# EAGLE board P004_AmanPandey_Speaker (EAGLE 9.6.2)
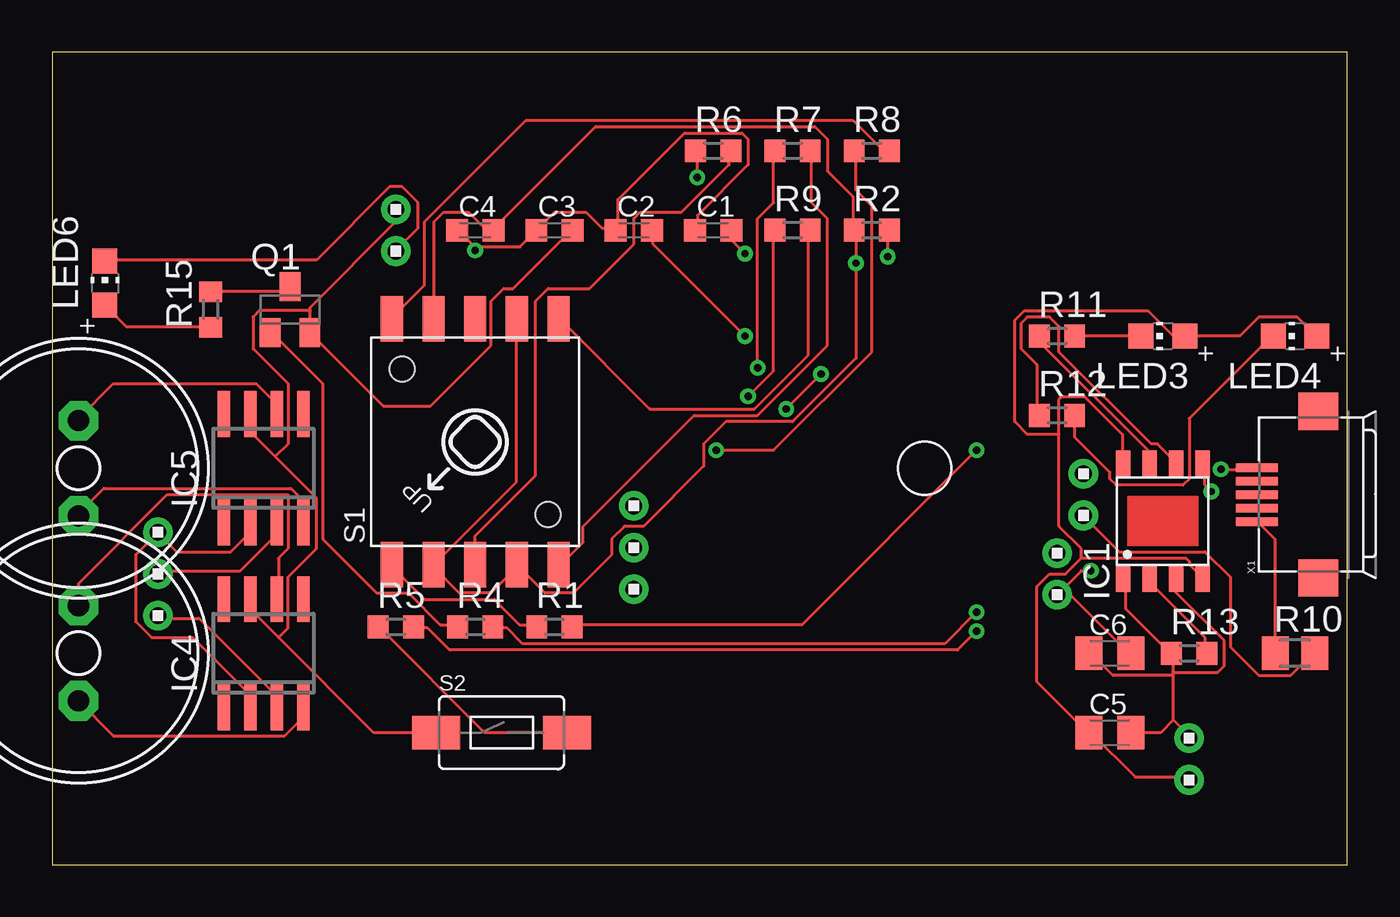
[diagram p0: board, top side]
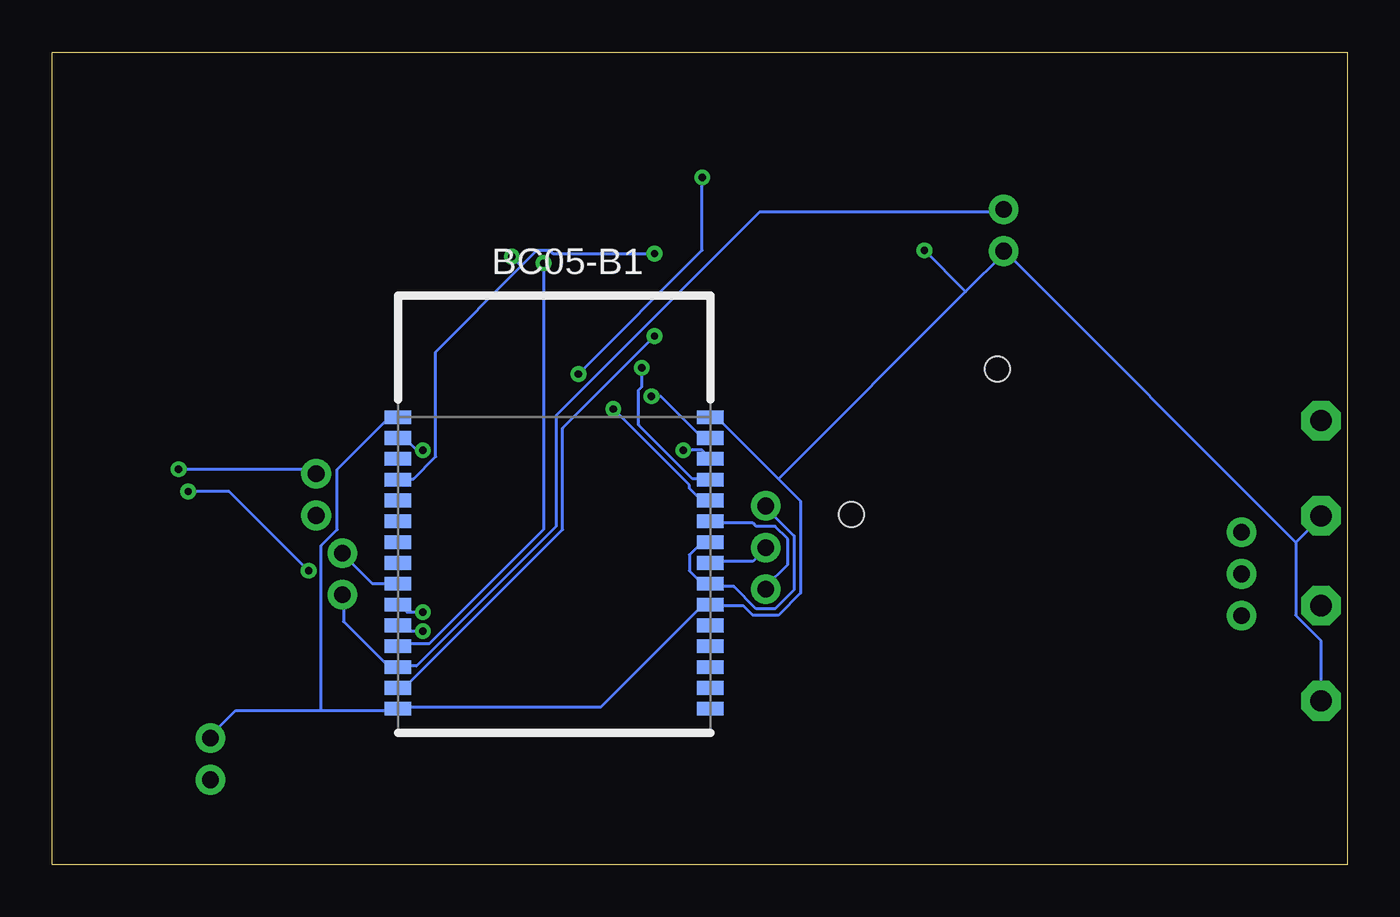
[diagram p1: board, bottom side, seen from below]

Size 62.21 x 39.04 mm. Coordinates in mm from the lower left corner, seen from the top.
Outline: 0,0 62.21,0 62.21,39.04 0,39.04 0,0
Copper layers (1*16): Top 0.035mm / dielectric 1.5mm / Bottom 0.035mm
Design rules "default": minimum track width 6mil, minimum drill 0.35mm, track to track 6mil, track to pad 6mil, pad to pad 6mil, via to via 6mil, smd to smd 6mil, copper to edge 40mil, drill to drill 6mil, minimum pad ring 10mil, minimum via ring 8mil, stop-mask expansion 4mil, vias tented up to drill 0mil, thermal gap 10mil

## Footprints (pad centres in the part's own frame; a part is rotated, then mirrored left to right if it is on the bottom)
BC05-B = smd 1.27 x 0.66 bottom: P$1 7.5,6.26; P$2 7.5,5.26; P$3 7.5,4.26; P$4 7.5,3.26; P$5 7.5,2.26; P$6 7.5,1.26; P$7 7.5,0.26; P$8 7.5,-0.74; P$9 7.5,-1.74; P$10 7.5,-2.74; P$11 7.5,-3.74; P$12 7.5,-4.74; P$13 7.5,-5.74; P$14 7.5,-6.74; P$15 7.5,-7.74; P$16 -7.5,-7.74; P$17 -7.5,-6.74; P$18 -7.5,-5.74; P$19 -7.5,-4.74; P$20 -7.5,-3.74; P$21 -7.5,-2.74; P$22 -7.5,-1.74; P$23 -7.5,-0.74; P$24 -7.5,0.26; P$25 -7.5,1.26; P$26 -7.5,2.26; P$27 -7.5,3.26; P$28 -7.5,4.26; P$29 -7.5,5.26; P$30 -7.5,6.26
C0603K = smd 1.05 x 1.08: 1 -0.875,0; 2 0.875,0
C0805K = smd 1.3 x 1.6: 1 -1,0; 2 1,0
SOP-8 = smd 1.3 x 0.7: 1 -2.75,1.905; 2 -2.75,0.635; 3 -2.75,-0.635; 4 -2.75,-1.905; 5 2.75,-1.905; 6 2.75,-0.635; 7 2.75,0.635; 8 2.75,1.905
SO8 = smd 0.6 x 2.2: 1 -1.905,-2.6; 2 -0.635,-2.6; 3 0.635,-2.6; 4 1.905,-2.6; 5 1.905,2.6; 6 0.635,2.6; 7 -0.635,2.6; 8 -1.905,2.6
CHIP-LED0805 = smd 1.2 x 1.2: A 0,-1.05; C 0,1.05
SOT23-BEC = smd 1 x 1.4: B -0.95,-1.1; C 0,1.1; E 0.95,-1.1
R0603 = smd 1 x 1.1: 1 -0.85,0; 2 0.85,0
M0805 = smd 1.3 x 1.6: 1 -0.95,0; 2 0.95,0
BUTTON = smd 2.184 x 1.067: A -5.9,4; B -5.9,-4; C 5.9,-4; D 5.9,4; E1 -5.9,0; E2 5.9,0; G1 -5.9,2; G2 -5.9,-2; G3 5.9,-2; G4 5.9,2 | hole 1.2: -3.5,-3.5; 3.5,3.5
TACTILE-SWITCH-1101NE = smd 2.3 x 1.6: P$1 -3.15,0; P$2 3.15,0
AL11P = drill 1.016 pad 1.905 octagon: + 2.286,0; - -2.286,0
1X2 = drill 0.8 pad 1.422: 1 -1,0; 2 1,0
1X3 = drill 0.8 pad 1.422: 1 -2,0; 2 0,0; 3 2,0
USB-MICROB = smd 0.4 x 2: D+ 0,3.1; D- -0.65,3.1; GND 1.3,3.1; ID 0.65,3.1; VBUS -1.3,3.1 | smd 1.8 x 1.9: GND@2 -4,0.15; GND@3 4,0.15

## Placement (x,y rotation side)
BC05-B1  BC05-B  [BC05-B]  38.1,15.24 0 top
C1  104  [C0603K]  31.75,30.48 0 top
C2  475  [C0603K]  27.94,30.48 0 top
C3  475  [C0603K]  24.13,30.48 0 top
C4  475  [C0603K]  20.32,30.48 0 top
C5  10uF  [C0805K]  50.8,6.35 0 top
C6  10uF  [C0805K]  50.8,10.16 0 top
IC1  TP4056  [SOP-8]  53.34,16.51 90 top
IC4  AD620R  [SO8]  10.16,10.16 0 top
IC5  AD620R  [SO8]  10.16,19.05 0 top
LED3  RED  [CHIP-LED0805]  53.34,25.4 90 top
LED4  GREEN  [CHIP-LED0805]  59.69,25.4 90 top
LED6  Blue  [CHIP-LED0805]  2.54,27.94 0 top
Q1  MMBT3906LT1SMD  [SOT23-BEC]  11.43,26.67 0 top
R1  10k  [R0603]  24.13,11.43 0 top
R2  10k  [R0603]  39.37,30.48 0 top
R4  1k  [R0603]  20.32,11.43 0 top
R5  10k  [R0603]  16.51,11.43 0 top
R6  10k  [R0603]  31.75,34.29 0 top
R7  10k  [R0603]  35.56,34.29 0 top
R8  10k  [R0603]  39.37,34.29 0 top
R9  10k  [R0603]  35.56,30.48 0 top
R10  0.5R  [M0805]  59.69,10.16 0 top
R11  1K  [R0603]  48.26,25.4 0 top
R12  1K  [R0603]  48.26,21.59 0 top
R13  5K  [R0603]  54.61,10.16 0 top
R15  47R  [R0603]  7.62,26.67 90 top
S1  BUTTON  [BUTTON]  20.32,20.32 90 top
S2  SWITCH-MOMENTARY-2-SMD-1101NE  [TACTILE-SWITCH-1101NE]  21.59,6.35 0 top
SP1  AL11P  [AL11P]  1.27,10.16 90 top
SP2  AL11P  [AL11P]  1.27,19.05 90 top
U$1  1X2  [1X2]  16.51,30.48 270 top
U$2  1X3  [1X3]  27.94,15.24 270 top
U$3  1X2  [1X2]  49.53,17.78 90 top
U$4  1X2  [1X2]  54.61,5.08 90 top
U$5  1X2  [1X2]  48.26,13.97 90 top
U$7  1X3  [1X3]  5.08,13.97 270 top
X1  USB-MICROB  [USB-MICROB]  60.96,17.78 90 top

## Library data of the parts
BC05-B1 S1 = ggaqquay
C1-C6 R1 R2 R4-R13 R15 = resistor
IC1 = TP4056
IC4 IC5 = analog-devices; MPN: AD620AR; OC_FARNELL: 1464424; OC_NEWARK: 05F7109
LED3 LED4 LED6 = adafruit
Q1 = transistor-pnp
S2 = SparkFun-Electromechanical
SP1 SP2 = buzzer; OC_FARNELL: unknown; OC_NEWARK: unknown
U$1-U$5 U$7 = headers(2mm)
X1 = SparkFun

## Nets
1.8V: BC05-B1.P$12 C4.2 R2.1 S1.G1 S1.G2 S1.G3 S1.G4
BLUE_LED: Q1.B R4.1
GND: BC05-B1.P$1 BC05-B1.P$15 BC05-B1.P$21 BC05-B1.P$30 C1.1 C2.1 C3.1 C4.1 C5.2 C6.1 IC1.1 IC1.3 IC4.4 IC5.4 LED6.C R13.1 SP1.- SP2.- U$1.2 U$4.2
N$1: BC05-B1.P$2 R1.2
N$2: BC05-B1.P$4 C1.2 R2.2
N$3: BC05-B1.P$11 R5.2
N$4: BC05-B1.P$10 R4.2
N$5: IC4.2 IC5.2 U$7.1
N$8: BC05-B1.P$23 U$2.2
N$9: BC05-B1.P$29 R9.1
N$10: BC05-B1.P$28 R8.1
N$11: BC05-B1.P$27 R7.1
N$12: BC05-B1.P$26 R6.1
N$13: R7.2 S1.B
N$14: R8.2 S1.D
N$15: R6.2 S1.E1
N$16: R10.2 U$3.1
N$17: R1.1 S1.A
N$18: R5.1 S2.P$2
N$19: BC05-B1.P$25 U$2.3
N$20: BC05-B1.P$14 C2.2
N$21: BC05-B1.P$22 BC05-B1.P$24 U$2.1
N$22: R10.1 X1.VBUS
N$23: C5.1 IC1.4 IC1.8 LED3.A LED4.A U$4.1
N$24: IC1.7 R11.1
N$25: LED3.C R11.2
N$26: LED4.C R12.2
N$27: IC1.6 R12.1
N$28: IC5.3 U$7.2
N$30: IC1.2 R13.2
N$31: LED6.A R15.1
N$32: IC4.3 U$7.3
N$33: R9.2 S1.C
N$34: U$3.2 X1.GND
N$35: Q1.C R15.2
N$41: IC4.6 SP1.+
N$42: IC5.6 SP2.+
RED_LED: BC05-B1.P$9 U$5.2
VCC: BC05-B1.P$13 C3.2 C6.2 IC1.5 IC4.7 IC5.7 Q1.E S2.P$1 U$1.1 U$5.1

## Tracks (layer width: path | path; a pad name or v marks a point on that pad's centre or on a via)
1.8V  (via drill 0.35)
  Top 0.152: S1.G3 22.3,26.16 22.3,18.39 18.34,14.43 S1.G1 18.34,14.28 19.56,13.06 21.08,13.06 22.3,14.28 S1.G2 22.45,14.28 23.67,13.06 25.04,13.06 26.87,14.88 26.87,15.65 27.48,16.26 28.4,16.26 31.29,19.15 31.29,20.22 32.36,21.28 35.56,21.28 38.61,24.33 v38.61,28.91 38.61,30.43 R2.1 38.46,30.58 38.46,32.11 37.24,33.33 37.24,34.85 36.63,35.46 26.11,35.46 21.23,30.58 C4.2 21.08,30.58 20.78,30.58 20.02,31.34 18.8,31.34 18.34,30.89 18.34,26.31 S1.G4
  Bottom 0.152: v38.61,28.91 38.61,16.1 44.09,10.62 45.47,10.62 BC05-B1.P$12
BLUE_LED
  Top 0.152: R4.1 19.41,11.53 18.64,11.53 17.12,13.06 15.6,13.06 13,15.65 13,23.11 10.57,25.55 Q1.B
GND  (via drill 0.35)
  Top 0.152: 53.85,6.96 53.85,9.09 | 53.85,9.09 53.85,9.25 | 53.85,9.25 53.85,10.16 R13.1 53.7,10.16 51.56,12.29 51.56,13.67 IC1.1 | 53.85,6.96 54.61,6.2 U$4.2 | 53.85,9.25 55.98,9.25 56.29,9.55 56.29,10.77 54,13.06 54,13.67 IC1.3 | C5.2 53.24,6.35 53.85,6.96 | 53.85,9.09 50.95,9.09 49.89,10.16 C6.1 | SP1.- 2.95,6.2 11.18,6.2 11.94,6.96 11.94,7.42 IC4.4 | IC5.4 11.94,16.56 11.94,17.63 11.48,18.09 2.49,18.09 1.27,16.87 SP2.- | 20.32,29.67 19.56,30.43 C4.1 | 20.32,29.67 22.45,29.67 23.22,30.43 C3.1 23.37,30.58 24.13,31.34 25.65,31.34 26.42,30.58 27.03,30.58 C2.1 27.18,30.58 27.18,31.95 30.38,35.15 33.12,35.15 33.43,34.85 33.43,33.63 30.99,31.19 30.99,30.58 C1.1 | LED6.C 2.64,29.06 12.7,29.06 16.2,32.56 16.81,32.56 17.58,31.8 17.58,30.58 16.51,29.52 U$1.2 | v20.32,29.52 20.32,29.67
  Bottom 0.152: 49.28,7.42 53.39,7.42 54.61,6.2 U$4.2 | 49.28,7.42 45.62,7.42 BC05-B1.P$15 45.47,7.57 35.86,7.57 30.99,12.45 30.68,12.45 BC05-B1.P$21 30.53,12.45 29.01,12.45 28.55,11.99 27.33,11.99 26.26,13.06 26.26,17.48 27.33,18.54 | 49.28,7.42 49.28,15.34 48.51,16.1 48.51,19 46.08,21.44 45.62,21.44 BC05-B1.P$1 | SP1.- 1.27,10.77 2.49,11.99 2.49,15.49 | 2.49,15.49 1.27,16.71 SP2.- | 27.33,18.54 30.23,21.44 30.53,21.44 BC05-B1.P$30 | 18.34,27.53 16.51,29.36 U$1.2 16.51,29.52 2.49,15.49 | 18.34,27.53 27.33,18.54 | 18.34,27.53 v20.32,29.52
N$1  (via drill 0.35)
  Top 0.152: v44.4,19.91 36.02,11.53 25.04,11.53 R1.2
  Bottom 0.152: v44.4,19.91 44.7,19.91 45.16,20.37 45.47,20.37 BC05-B1.P$2
N$2  (via drill 0.35)
  Top 0.152: v33.27,29.36 32.66,29.97 32.66,30.43 C1.2 | v40.13,29.21 40.13,30.43 R2.2
  Bottom 0.152: v33.27,29.36 38.15,29.36 38.3,29.52 38.91,29.52 39.67,28.75 | 39.67,28.75 43.79,24.64 43.79,19.61 44.86,18.54 45.47,18.54 BC05-B1.P$4 | 39.67,28.75 v40.13,29.21
N$3  (via drill 0.35)
  Top 0.152: v44.4,11.23 43.48,10.31 19.1,10.31 18.03,11.38 17.42,11.38 R5.2
  Bottom 0.152: v44.4,11.23 45.31,11.23 45.47,11.38 BC05-B1.P$11
N$4  (via drill 0.35)
  Top 0.152: v44.4,12.14 42.87,10.62 22.61,10.62 21.84,11.38 21.23,11.38 R4.2
  Bottom 0.152: v44.4,12.14 45.16,12.14 45.47,12.45 BC05-B1.P$10
N$5
  Top 0.152: 5.08,15.95 4.01,14.88 4.01,11.68 4.77,10.92 6.76,10.92 9.5,8.18 9.5,7.57 IC4.2 | 5.08,15.95 5.99,15.04 8.58,15.04 9.5,15.95 9.5,16.41 IC5.2 | 5.08,15.95 U$7.1
N$8
  Bottom 0.152: BC05-B1.P$23 30.53,14.58 28.55,14.58 27.94,15.19 U$2.2
N$9  (via drill 0.35)
  Top 0.152: v33.43,22.5 34.65,23.72 34.65,30.43 R9.1
  Bottom 0.152: v33.43,22.5 32.97,22.5 30.99,20.52 30.68,20.52 BC05-B1.P$29
N$10  (via drill 0.35)
  Top 0.152: v31.9,19.91 34.65,19.91 39.37,24.64 39.37,31.65 38.61,32.41 38.61,34.24 R8.1
  Bottom 0.152: v31.9,19.91 30.99,19.91 30.68,19.61 BC05-B1.P$28
N$11  (via drill 0.35)
  Top 0.152: v33.88,23.88 33.88,31.04 34.65,31.8 34.65,34.24 R7.1
  Bottom 0.152: v33.88,23.88 33.88,22.96 34.04,22.81 34.04,21.13 31.45,18.54 30.68,18.54 BC05-B1.P$27
N$12  (via drill 0.35)
  Top 0.152: v30.99,33.02 30.99,34.24 R6.1 | v35.25,21.9 v36.93,23.57
  Bottom 0.152: v30.99,33.02 30.99,29.52 v36.93,23.57 | v35.25,21.9 31.6,18.24 31.6,18.09 31.14,17.63 30.68,17.63 BC05-B1.P$26
N$13
  Top 0.152: R7.2 36.47,34.24 36.47,31.8 37.24,31.04 37.24,24.94 33.88,21.59 30.84,21.59 25.5,16.26 25.5,15.49 24.43,14.43 S1.B
N$14
  Top 0.152: R8.2 40.13,34.39 39.83,34.39 38.46,35.76 22.76,35.76 17.88,30.89 17.88,27.84 16.36,26.31 S1.D
N$15
  Top 0.152: S1.E1 20.32,15.8 23.22,18.69 23.22,27.08 23.82,27.69 25.81,27.69 27.94,29.82 27.94,31.04 28.24,31.34 30.23,31.34 32.51,33.63 32.51,34.24 R6.2
N$16
  Top 0.152: R10.2 60.55,10.16 59.49,9.09 57.96,9.09 56.59,10.46 56.59,13.82 55.37,15.04 51.26,15.04 49.58,16.71 U$3.1
N$17
  Top 0.152: R1.1 23.22,11.53 22.45,11.53 21.23,12.75 17.88,12.75 16.36,14.28 S1.A
N$18
  Top 0.152: S2.P$2 20.78,6.35 15.75,11.38 R5.1
N$19
  Bottom 0.152: BC05-B1.P$25 30.53,16.41 28.55,16.41 28.4,16.26 27.48,16.26 26.87,15.65 26.87,14.43 27.94,13.36 U$2.3
N$20  (via drill 0.35)
  Top 0.152: v33.27,25.4 28.85,29.82 28.85,30.43 C2.2
  Bottom 0.152: v33.27,25.4 37.69,20.98 37.69,16.1 45.16,8.64 45.47,8.64 BC05-B1.P$14
N$21
  Bottom 0.152: BC05-B1.P$24 30.68,15.49 30.99,15.49 31.6,14.88 31.6,14.12 30.99,13.51 30.68,13.51 BC05-B1.P$22 30.53,13.36 29.46,13.36 28.4,12.29 27.48,12.29 26.57,13.21 26.57,15.8 27.94,17.17 U$2.1
N$22
  Top 0.152: R10.1 58.72,10.16 58.72,15.65 57.96,16.41 X1.VBUS
N$23
  Top 0.152: LED4.A 60.71,25.4 59.79,26.31 57.96,26.31 57.05,25.4 LED3.A 53.85,25.4 52.63,26.62 46.68,26.62 46.23,26.16 46.23,21.28 46.84,20.68 48.36,20.68 | 49.43,14.73 54.46,14.73 54.61,14.58 54.61,14.43 55.22,13.82 IC1.4 | 49.43,14.73 48.67,13.97 47.9,13.97 47.3,13.36 47.3,8.79 49.73,6.35 C5.1 49.89,6.35 52.02,4.22 54.61,4.22 U$4.1 | 48.36,20.68 48.36,16.26 49.43,15.19 49.43,14.73 | 48.36,20.68 48.36,22.35 48.51,22.5 49.58,22.5 51.41,20.68 51.41,19.3 IC1.8
N$24
  Top 0.152: R11.1 47.45,25.4 47.45,25.09 52.63,19.91 52.63,19.3 IC1.7
N$25
  Top 0.152: LED3.C R11.2
N$26
  Top 0.152: R12.2 49.12,21.59 49.12,20.52 50.8,18.85 50.8,18.54 51.11,18.24 54.3,18.24 54.61,18.54 54.61,21.44 58.57,25.4 LED4.C
N$27
  Top 0.152: R12.1 47.3,21.59 47.3,24.03 46.53,24.79 46.53,26.01 46.84,26.31 47.9,26.31 48.36,25.86 48.36,24.64 52.78,20.22 53.09,20.22 54,19.3 IC1.6
N$28
  Top 0.152: U$7.2 5.23,14.12 9.04,14.12 10.72,15.8 10.72,16.41 IC5.3
N$30
  Top 0.152: R13.2 55.37,10.16 55.37,10.92 52.63,13.67 IC1.2
N$31
  Top 0.152: R15.1 7.52,25.86 3.56,25.86 2.64,26.77 LED6.A
N$32
  Top 0.152: IC4.3 10.72,7.57 10.72,8.18 7.06,11.84 5.08,11.84 U$7.3
N$33
  Top 0.152: R9.2 36.32,30.43 36.32,24.49 33.73,21.9 28.7,21.9 24.43,26.16 S1.C
N$34  (via drill 0.35)
  Top 0.152: v56.13,19 57.81,19 X1.GND
  Bottom 0.152: v56.13,19 49.73,19 49.58,18.85 U$3.2
N$35
  Top 0.152: R15.2 7.67,27.53 11.18,27.53 11.33,27.69 Q1.C
N$41
  Top 0.152: SP1.+ 1.27,13.51 5.54,17.78 11.33,17.78 11.33,15.19 10.87,14.73 10.87,12.9 IC4.6
N$42
  Top 0.152: IC5.6 10.72,21.74 10.72,22.2 9.8,23.11 2.95,23.11 1.27,21.44 SP2.+
RED_LED
  Bottom 0.152: BC05-B1.P$9 45.62,13.51 46.84,13.51 48.21,14.88 U$5.2
VCC  (via drill 0.35)
  Top 0.152: 10.87,10.92 15.44,6.35 S2.P$1 | 10.87,10.92 9.65,12.14 9.65,12.75 IC4.7 | 10.72,19.61 12.7,17.63 12.7,15.19 11.33,13.82 11.33,11.38 10.87,10.92 | 10.72,19.61 9.65,20.68 9.65,21.59 IC5.7 | v55.68,17.93 55.37,18.24 55.37,19.15 IC1.5 | v49.89,14.12 49.43,14.12 48.51,13.21 | 48.51,13.21 48.36,13.06 U$5.1 48.51,13.21 | 48.51,13.21 48.67,13.21 51.71,10.16 C6.2 | C3.2 24.89,30.43 22.15,27.69 21.69,27.69 21.08,27.08 21.08,24.94 18.19,22.05 15.9,22.05 12.39,25.55 Q1.E 12.39,25.7 12.39,26.62 | U$1.1 16.51,30.89 12.39,26.77 12.39,26.62 | 10.72,19.61 11.33,20.22 11.33,23.11 9.65,24.79 9.65,26.31 9.96,26.62 12.39,26.62
  Bottom 0.152: U$5.1 48.21,12.9 48.21,11.68 46.08,9.55 45.62,9.55 BC05-B1.P$13 45.47,9.55 44.7,9.55 38,16.26 38,21.59 28.24,31.34 16.51,31.34 U$1.1 | v55.68,17.93 53.7,17.93 v49.89,14.12